# Altium PCB PCB1.PcbDoc (part 2 of 8)
Units mil, origin at the board's own origin, x right, y up, seen from the top; angles counter-clockwise.
Board outline 6000 x 4000 mil, 2 copper layers (Top Layer, Bottom Layer); 1253 components, 565 nets, 6549 pads, 0 vias.
Unrouted connection lines stored in the file: 1925.
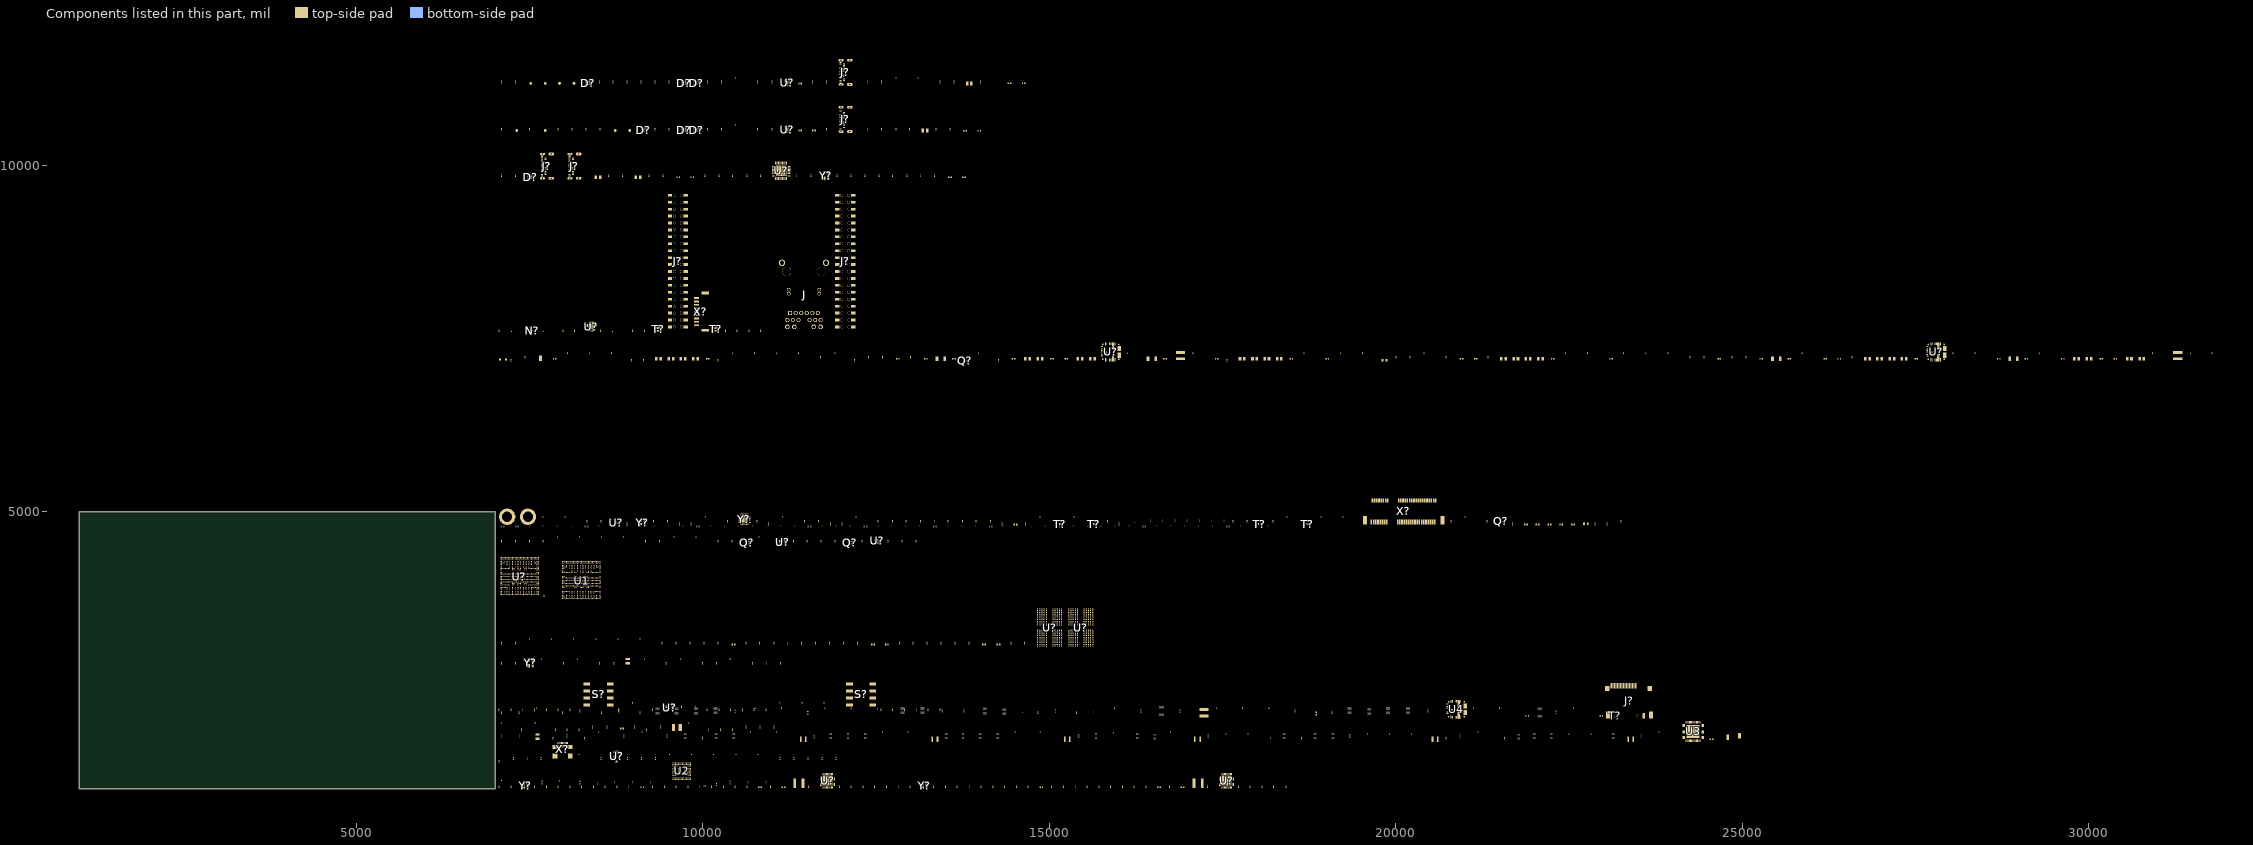
[diagram p2: the components of this part, seen from the top]

## Components (designator, comment, footprint, x,y, rotation, side; value= is the part's Value field where it differs from the comment) (continued)
C? "CAP_0201_100n_X7S_16V" CAP_0201_UN1Q 14355,1025 r90 top value=100nF
C? "CAP_0201_15p" CAP_0201_UN1Q 12990,1025 r90 top value=15pF
C? "CAP_0201_100n_X7S_16V" CAP_0201_UN1Q 8250,1025 r90 top value=100nF
C? "CAP_0201_1uF_X6S" CAP_0201_UN1Q 9955,1025 r90 top value=1uF
C? "CAP_0201_1uF_X6S" CAP_0201_UN1Q 15545,1025 r90 top value=1uF
C? "CAP_0402_10u_X6S" CAP_0402_H09W07_UN1Q 10825,1020 r0 top value=10uF
C? "CAP_0201_15p" CAP_0201_UN1Q 13330,1025 r90 top value=15pF
C? "CAP_0201_100n_X7S_16V" CAP_0201_UN1Q 7910,1025 r90 top value=100nF
C? "CAP_0201_100n_X7S_16V" CAP_0201_UN1Q 7740,1025 r90 top value=100nF
C? "CAP_0201_12pF_RF_MATCHING" CAP_0201_UN1Q 12135,9845 r90 top value=12pF
C? "CAP_0201_100n_X7S_16V" CAP_0201_UN1Q 13145,9845 r90 top value=100nF
C? "CAP_0201_100n_X7S_16V" CAP_0201_UN1Q 12540,9845 r90 top value=100nF
C? "CAP_0201_100n_X7S_16V" CAP_0201_UN1Q 10325,7610 r90 top value=100nF
C? "CAP_0201_100n_X7S_16V" CAP_0201_UN1Q 7060,7610 r90 top value=100nF
C? "CAP_0201_100n_X7S_16V" CAP_0201_UN1Q 9220,9845 r90 top value=100nF
C? "CAP_0402_4u7_10V_X6S" CAP_0402_H09W07_UN1Q 13565,9825 r0 top value=4.7uF
C? "CAP_0201_100n_X7S_16V" CAP_0201_UN1Q 12740,9845 r90 top value=100nF
C? "CAP_0201_100n_X7S_16V" CAP_0201_UN1Q 12340,9845 r90 top value=100nF
C? "CAP_0201_100n_X7S_16V" CAP_0201_UN1Q 11355,9845 r90 top value=100nF
C? "CAP_0805_22uF_10V_X7R" CAP_0805_UN1Q 8485,9825 r0 top value=22uF
C? "CAP_0402_4u7_10V_X6S" CAP_0402_H09W07_UN1Q 13770,9825 r0 top value=4.7uF
C? "CAP_0201_12pF_RF_MATCHING" CAP_0201_UN1Q 11560,9845 r90 top value=12pF
C? "CAP_0201_100n_X7S_16V" CAP_0201_UN1Q 10835,7610 r90 top value=100nF
C? "CAP_0805_2u2_50V_X7R" CAP_0805_UN1Q 30590,7205 r0 top value=2.2uF
C? "CAP_0805_2u2_50V_X7R" CAP_0805_UN1Q 15625,7205 r0 top value=2.2uF
C? "CAP_0805_22uF_10V_X7R" CAP_0805_UN1Q 17785,7205 r0 top value=22uF
C? "CAP_0402_22nF" CAP_0402_UN1Q 15245,7205 r0 top value=22nF
C? "CAP_0402_100nF_50V" CAP_0402_UN1Q 20950,7205 r0 top value=100nF
C? "CAP_0805_2u2_50V_X7R" CAP_0805_UN1Q 14685,7205 r0 top value=2.2uF
C? "CAP_0805_22uF_10V_X7R" CAP_0805_UN1Q 9895,7205 r0 top value=22uF
C? "CAP_0201_100n_X7S_16V" CAP_0201_UN1Q 10665,7610 r90 top value=100nF
C? "CAP_0201_100n_X7S_16V" CAP_0201_UN1Q 7980,7610 r90 top value=100nF
C? "CAP_0201_100n_X7S_16V" CAP_0201_UN1Q 8525,7610 r90 top value=100nF
C? "CAP_1206_10uF_X7R" CAP_1206_UN1Q 25495,7205 r0 top value=10uF
C? "CAP_0805_22uF_10V_X7R" CAP_0805_UN1Q 27165,7205 r0 top value=22uF
C? "CAP_0201_100n_X7S_16V" CAP_0201_UN1Q 10495,7610 r90 top value=100nF
C? "CAP_0201_100n_X7S_16V" CAP_0201_UN1Q 13345,9845 r90 top value=100nF
C? "CAP_0201_100n_X7S_16V" CAP_0201_UN1Q 14005,11200 r90 top value=100nF
C? "CAP_0402_2u2_10V_X6S" CAP_0402_H09W07_UN1Q 11405,11180 r0 top value=2.2uF
C? "CAP_0201_220n_10V_X6S" CAP_0201_UN1Q 10070,11200 r90 top value=220nF
C? "CAP_0201_27p" CAP_0201_UN1Q 12985,10520 r90 top value=27pF
C? "CAP_0201_100n_X7S_16V" CAP_0201_UN1Q 11585,11200 r90 top value=100nF
C? "CAP_0201_220n_10V_X6S" CAP_0201_UN1Q 10995,11200 r90 top value=220nF
C? "CAP_0201_100n_X7S_16V" CAP_0201_UN1Q 8505,11200 r90 top value=100nF
C? "CAP_0201_27p" CAP_0201_UN1Q 13625,11200 r90 top value=27pF
C? "CAP_0805_22uF_10V_X7R" CAP_0805_UN1Q 13845,11180 r0 top value=22uF
C? "CAP_0201_1uF_X6S" CAP_0201_UN1Q 13425,11200 r90 top value=1uF
C? "CAP_0201_220n_10V_X6S" CAP_0201_UN1Q 10270,11200 r90 top value=220nF
C? "CAP_0201_220n_10V_X6S" CAP_0201_UN1Q 10790,11200 r90 top value=220nF
C? "CAP_0201_100n_X7S_16V" CAP_0201_UN1Q 7295,11200 r90 top value=100nF
C? "CAP_0201_100n_X7S_16V" CAP_0201_UN1Q 7500,10520 r90 top value=100nF
C? "CAP_0201_100n_X7S_16V" CAP_0201_UN1Q 7090,10520 r90 top value=100nF
C? "CAP_0805_22uF_10V_X7R" CAP_0805_UN1Q 13205,10500 r0 top value=22uF
C? "CAP_0402_2u2_10V_X6S" CAP_0402_H09W07_UN1Q 11605,10500 r0 top value=2.2uF
C? "CAP_0201_100n_X7S_16V" CAP_0201_UN1Q 12945,9845 r90 top value=100nF
C? "CAP_0201_100n_X7S_16V" CAP_0201_UN1Q 8640,9845 r90 top value=100nF
C? "CAP_0805_22uF_10V_X7R" CAP_0805_UN1Q 9065,9825 r0 top value=22uF
C? "CAP_0201_220n_10V_X6S" CAP_0201_UN1Q 10790,10520 r90 top value=220nF
C? "CAP_0201_220n_10V_X6S" CAP_0201_UN1Q 10995,10520 r90 top value=220nF
C? "CAP_0201_100n_X7S_16V" CAP_0201_UN1Q 13365,10520 r90 top value=100nF
C? "CAP_0201_1uF_X6S" CAP_0201_UN1Q 12785,10520 r90 top value=1uF
C? "CAP_0402_2u2_10V_X6S" CAP_0402_H09W07_UN1Q 11405,10500 r0 top value=2.2uF
C? "CAP_0201_220n_10V_X6S" CAP_0201_UN1Q 10270,10520 r90 top value=220nF
C? "CAP_0201_220n_10V_X6S" CAP_0201_UN1Q 10070,10520 r90 top value=220nF
C? "CAP_0805_22uF_10V_X7R" CAP_0805_UN1Q 21555,7205 r0 top value=22uF
C? "CAP_0805_2u2_50V_X7R" CAP_0805_UN1Q 30770,7205 r0 top value=2.2uF
C? "CAP_0402_100nF_50V" CAP_0402_UN1Q 7860,7205 r0 top value=100nF
C? "CAP_0805_22uF_10V_X7R" CAP_0805_UN1Q 26985,7205 r0 top value=22uF
C? "CAP_0201_2n2" CAP_0201_UN1Q 9140,7185 r90 top value=2.2nF
C? "CAP_0805_22uF_10V_X7R" CAP_0805_UN1Q 22090,7205 r0 top value=22uF
C? "CAP_0402_100nF_50V" CAP_0402_UN1Q 16670,7205 r0 top value=100nF
C? "CAP_0402_100nF_50V" CAP_0402_UN1Q 15040,7205 r0 top value=100nF
C? "CAP_0805_22uF_10V_X7R" CAP_0805_UN1Q 18320,7205 r0 top value=22uF
C? "CAP_0402_100nF_50V" CAP_0402_UN1Q 27515,7205 r0 top value=100nF
C? "CAP_0201_1uF_X6S" CAP_0201_UN1Q 12995,7225 r90 top value=1uF
C? "CAP_0402_100nF_50V" CAP_0402_UN1Q 22265,7205 r0 top value=100nF
C? "CAP_0201_1uF_X6S" CAP_0201_UN1Q 25055,7225 r90 top value=1uF
C? "CAP_0402_100nF_50V" CAP_0402_UN1Q 10070,7205 r0 top value=100nF
C? "CAP_0201_220n_10V_X6S" CAP_0201_UN1Q 14660,4820 r90 top value=220nF
C? "CAP_0402_10u_X6S" CAP_0402_H09W07_UN1Q 22390,4815 r0 top value=10uF
C? "CAP_0201_15p" CAP_0201_UN1Q 9290,4860 r90 top value=15pF
C? "CAP_0201_1uF_X6S" CAP_0201_UN1Q 10780,4860 r90 top value=1uF
C? "CAP_0201_47p" CAP_0201_UN1Q 22880,4820 r90 top value=47pF
C? "CAP_0201_220n_10V_X6S" CAP_0201_UN1Q 16010,4820 r90 top value=220nF
C? "CAP_0201_1n0" CAP_0201_UN1Q 23050,4820 r90 top value=1nF
C? "CAP_0201_100n_X7S_16V" CAP_0201_UN1Q 14320,4820 r90 top value=100nF
C? "CAP_0402_100nF_50V" CAP_0402_UN1Q 21155,7205 r0 top value=100nF
C? "CAP_0402_100nF_50V" CAP_0402_UN1Q 13625,7205 r0 top value=100nF
C? "CAP_0402_10u_X6S" CAP_0402_H09W07_UN1Q 22050,4815 r0 top value=10uF
C? "CAP_0201_100n_X7S_16V" CAP_0201_UN1Q 9830,4820 r90 top value=100nF
C? "CAP_0603_22u_6.3V_X6S" CAP_0603_UN1Q 22745,4825 r0 top value=22uF
C? "CAP_0402_100nF_50V" CAP_0402_UN1Q 30185,7205 r0 top value=100nF
C? "CAP_0805_2u2_50V_X7R" CAP_0805_UN1Q 15445,7205 r0 top value=2.2uF
C? "CAP_0805_22uF_10V_X7R" CAP_0805_UN1Q 9360,7205 r0 top value=22uF
C? "CAP_0805_2u2_50V_X7R" CAP_0805_UN1Q 14865,7205 r0 top value=2.2uF
C? "CAP_0402_22nF" CAP_0402_UN1Q 30390,7205 r0 top value=22nF
C? "CAP_0805_22uF_10V_X7R" CAP_0805_UN1Q 18140,7205 r0 top value=22uF
C? "CAP_0805_22uF_10V_X7R" CAP_0805_UN1Q 21735,7205 r0 top value=22uF
C? "CAP_0402_100nF_50V" CAP_0402_UN1Q 18495,7205 r0 top value=100nF
C? "CAP_0201_10pF_RF_MATCHING" CAP_0201_UN1Q 8970,7185 r90 top value=10pF
C? "CAP_0805_22uF_10V_X7R" CAP_0805_UN1Q 26810,7205 r0 top value=22uF
C? "CAP_1206_10uF_X7R" CAP_1206_UN1Q 28920,7205 r0 top value=10uF
C? "CAP_0805_22uF_10V_X7R" CAP_0805_UN1Q 9540,7205 r0 top value=22uF
C? "CAP_0402_100nF_50V" CAP_0402_UN1Q 26200,7205 r0 top value=100nF
C? "CAP_0805_22uF_10V_X7R" CAP_0805_UN1Q 21910,7205 r0 top value=22uF
C? "CAP_0402_100nF_50V" CAP_0402_UN1Q 13220,7205 r0 top value=100nF
C? "CAP_0402_100nF_50V" CAP_0402_UN1Q 25680,7205 r0 top value=100nF
C? "CAP_0402_100nF_50V" CAP_0402_UN1Q 12815,7205 r0 top value=100nF
C? "CAP_0805_2u2_50V_X7R" CAP_0805_UN1Q 30010,7205 r0 top value=2.2uF
C? "CAP_1206_10uF_X7R" CAP_1206_UN1Q 13435,7205 r0 top value=10uF
C? "CAP_0805_2u2_50V_X7R" CAP_0805_UN1Q 29830,7205 r0 top value=2.2uF
C? "CAP_1206_10uF_X7R" CAP_1206_UN1Q 16480,7205 r0 top value=10uF
C? "CAP_0402_100nF_50V" CAP_0402_UN1Q 25275,7205 r0 top value=100nF
C? "CAP_0402_100nF_50V" CAP_0402_UN1Q 17415,7205 r0 top value=100nF
C? "CAP_0805_22uF_10V_X7R" CAP_0805_UN1Q 9715,7205 r0 top value=22uF
C? "CAP_0402_100nF_50V" CAP_0402_UN1Q 29105,7205 r0 top value=100nF
C? "CAP_0805_22uF_10V_X7R" CAP_0805_UN1Q 17965,7205 r0 top value=22uF
C? "CAP_0805_22uF_10V_X7R" CAP_0805_UN1Q 27340,7205 r0 top value=22uF
C? "CAP_0402_100nF_50V" CAP_0402_UN1Q 24670,7205 r0 top value=100nF
D? "TPD4E05U06DQAR" USON10_DQA_TI 9150,10505 r0 top
D? "TPD4E05U06DQAR" USON10_DQA_TI 9730,10505 r0 top
D? "TPD4E05U06DQAR" USON10_DQA_TI 7515,9825 r0 top
D? "TPD4E05U06DQAR" USON10_DQA_TI 9910,10505 r0 top
D? "TPD4E05U06DQAR" USON10_DQA_TI 9730,11185 r0 top
D? "TPD4E05U06DQAR" USON10_DQA_TI 8345,11185 r0 top
D? "TPD4E05U06DQAR" USON10_DQA_TI 9910,11185 r0 top
D? "TPD4E05U06DQAR" USON10_DQA_TI 9150,10505 r0 top
D? "TPD4E05U06DQAR" USON10_DQA_TI 9730,10505 r0 top
D? "TPD4E05U06DQAR" USON10_DQA_TI 7515,9825 r0 top
D? "TPD4E05U06DQAR" USON10_DQA_TI 9910,10505 r0 top
D? "TPD4E05U06DQAR" USON10_DQA_TI 9730,11185 r0 top
D? "TPD4E05U06DQAR" USON10_DQA_TI 8345,11185 r0 top
D? "TPD4E05U06DQAR" USON10_DQA_TI 9910,11185 r0 top
J "0826-1X1T-M1-F" BEL_0826-1X1T-M1-F 11460,8465 r0 top
J "0826-1X1T-M1-F" BEL_0826-1X1T-M1-F 11460,8465 r0 top
J1 "PAD 1 x 2 mm" TP_1x2mm_UN1Q 24795,1745 r0 top
J2 "PAD 1 x 2 mm" TP_1x2mm_UN1Q 24965,1765 r0 top
J? "USB_C_AMPHENOL_124018612112A" USB_C_AMPHENOL_124018612112A 7745,9985 r90 top
J? "USB_C_AMPHENOL_124018612112A" USB_C_AMPHENOL_124018612112A 8140,9985 r90 top
J? "Testpoint, Surface, 1.0mm" TP_1mm_UN1Q 8735,10500 r0 top
J? "USB_C_AMPHENOL_124018612112A" USB_C_AMPHENOL_124018612112A 12055,10660 r90 top
J? "PAD 1 x 2 mm" TP_1x2mm_UN1Q 7655,7210 r0 top
J? "NPTC202KFMS-RC" SULLINS_NPTC202KFMS-RC 9640,8615 r90 top
J? "NPTC202KFMS-RC" SULLINS_NPTC202KFMS-RC 12055,8615 r90 top
J? "Testpoint, Surface, 1.0mm" TP_1mm_UN1Q 7315,10500 r0 top
J? "USB_C_AMPHENOL_124018612112A" USB_C_AMPHENOL_124018612112A 12055,11340 r90 top
J? "Testpoint, Surface, 1.0mm" TP_1mm_UN1Q 7930,11180 r0 top
J? "Testpoint, Surface, 1.0mm" TP_1mm_UN1Q 7515,11180 r0 top
J? "Testpoint, Surface, 1.0mm" TP_1mm_UN1Q 7725,11180 r0 top
J? "Testpoint, Surface, 1.0mm" TP_1mm_UN1Q 7725,10500 r0 top
J? "Testpoint, Surface, 1.0mm" TP_1mm_UN1Q 8945,10500 r0 top
J? "Testpoint, Surface, 1.0mm" TP_1mm_UN1Q 8140,11180 r0 top
J? "USB_C_AMPHENOL_124018612112A" USB_C_AMPHENOL_124018612112A 7745,9985 r90 top
J? "USB_C_AMPHENOL_124018612112A" USB_C_AMPHENOL_124018612112A 8140,9985 r90 top
J? "Testpoint, Surface, 1.0mm" TP_1mm_UN1Q 8735,10500 r0 top
J? "USB_C_AMPHENOL_124018612112A" USB_C_AMPHENOL_124018612112A 12055,10660 r90 top
J? "PAD 1 x 2 mm" TP_1x2mm_UN1Q 7655,7210 r0 top
J? "NPTC202KFMS-RC" SULLINS_NPTC202KFMS-RC 9640,8615 r90 top
J? "NPTC202KFMS-RC" SULLINS_NPTC202KFMS-RC 12055,8615 r90 top
J? "Testpoint, Surface, 1.0mm" TP_1mm_UN1Q 7315,10500 r0 top
J? "USB_C_AMPHENOL_124018612112A" USB_C_AMPHENOL_124018612112A 12055,11340 r90 top
J? "Testpoint, Surface, 1.0mm" TP_1mm_UN1Q 7930,11180 r0 top
J? "Testpoint, Surface, 1.0mm" TP_1mm_UN1Q 7515,11180 r0 top
J? "Testpoint, Surface, 1.0mm" TP_1mm_UN1Q 7725,11180 r0 top
J? "Testpoint, Surface, 1.0mm" TP_1mm_UN1Q 7725,10500 r0 top
J? "Testpoint, Surface, 1.0mm" TP_1mm_UN1Q 8945,10500 r0 top
J? "Testpoint, Surface, 1.0mm" TP_1mm_UN1Q 8140,11180 r0 top
J? "693071020811" 693071020811 23375,2050 r0 top
J? "PAD 1 x 2 mm" TP_1x2mm_UN1Q 23580,2050 r0 top
L1 "IND_VLS2520_0u47" IND_VLS2520 23395,1710 r0 top value=0.47uH
L2 "IND_VLS2520_0u47" IND_VLS2520 20570,1710 r0 top value=0.47uH
L3 "IND_VLS2520_0u47" IND_VLS2520 17140,1710 r0 top value=0.47uH
L4 "IND_VLS2520_0u47" IND_VLS2520 15260,1710 r0 top value=0.47uH
L5 "IND_VLS2520_0u47" IND_VLS2520 13350,1710 r0 top value=0.47uH
L6 "IND_VLS2520_0u47" IND_VLS2520 11450,1710 r0 top value=0.47uH
L7 "FERRITE_0402_BLM15KD" FERR_BLM15KD 24560,1710 r0 top value=30R@100MHz
L8 "FERRITE_0402_BLM15KD" FERR_BLM15KD 22970,2050 r0 top value=30R@100MHz
L9 "FERRITE_0402_BLM15KD" FERR_BLM15KD 21900,2050 r0 top value=30R@100MHz
L10 "IND_XGL4030_1u" IND_XGL4030 17235,2095 r90 top value=1uH
L11 "FERRITE_0402_BLM15KD" FERR_BLM15KD 18855,2085 r90 top value=30R@100MHz
L12 "FERRITE_0402_BLM15KD" FERR_BLM15KD 11515,2095 r90 top value=30R@100MHz
L? "FERRITE_0201_BLF_700MHz_420Ohm" IND_0201_UN1Q 9375,4570 r90 top value=420R@700MHz
L? "FERRITE_0201_BLF_700MHz_420Ohm" IND_0201_UN1Q 12530,4860 r90 top value=420R@700MHz
L? "FERRITE_0201_BLM03_33Ohm" IND_0201_UN1Q 9315,1435 r90 top value=33R@100MHz
L? "FERRITE_0201_BLF_700MHz_420Ohm" IND_0201_UN1Q 13075,4570 r90 top value=420R@700MHz
L? "FERRITE_0402_BLM15KD" FERR_BLM15KD 14485,7205 r0 top value=30R@100MHz
L? "FERRITE_0402_BLM15KD" FERR_BLM15KD 29630,7205 r0 top value=30R@100MHz
L? "FERRITE_0201_BLF_700MHz_420Ohm" IND_0201_UN1Q 11470,4860 r90 top value=420R@700MHz
L? "FERRITE_0201_BLF_700MHz_420Ohm" IND_0201_UN1Q 10355,4860 r90 top value=420R@700MHz
L? "IND_74479335329222_2u2" IND_74479335329222_353220 11385,1075 r0 top value=2.2uH
L? "FERRITE_0201_BLM03_33Ohm" IND_0201_UN1Q 18070,1025 r90 top value=33R@100MHz
L? "FERRITE_0201_BLM03_33Ohm" IND_0201_UN1Q 10125,1025 r90 top value=33R@100MHz
L? "FERRITE_0201_BLM03_33Ohm" IND_0201_UN1Q 17285,1025 r90 top value=33R@100MHz
L? "FERRITE_0201_BLM03_33Ohm" IND_0201_UN1Q 12310,1025 r90 top value=33R@100MHz
L? "FERRITE_0201_BLM03_33Ohm" IND_0201_UN1Q 15885,1025 r90 top value=33R@100MHz
L? "FERRITE_0201_BLM03_33Ohm" IND_0201_UN1Q 11525,1025 r90 top value=33R@100MHz
L? "IND_74479335329222_2u2" IND_74479335329222_353220 17150,1075 r0 top value=2.2uH
L? "FERRITE_0201_BLM03_33Ohm" IND_0201_UN1Q 7090,9845 r90 top value=33R@100MHz
L? "FERRITE_0201_BLM03_33Ohm" IND_0201_UN1Q 7295,9845 r90 top value=33R@100MHz
L? "FERRITE_0201_BLF_700MHz_420Ohm" IND_0201_UN1Q 8985,7610 r90 top value=420R@700MHz
L? "FERRITE_0201_BLF_700MHz_420Ohm" IND_0201_UN1Q 11935,9845 r90 top value=420R@700MHz
L? "FERRITE_0201_BLM03_33Ohm" IND_0201_UN1Q 9510,11200 r90 top value=33R@100MHz
L? "FERRITE_0201_BLM03_33Ohm" IND_0201_UN1Q 11785,11200 r90 top value=33R@100MHz
L? "FERRITE_0201_BLM03_33Ohm" IND_0201_UN1Q 9510,10520 r90 top value=33R@100MHz
L? "FERRITE_0201_BLM03_33Ohm" IND_0201_UN1Q 11785,10520 r90 top value=33R@100MHz
L? "FERRITE_0402_BLM15KD" FERR_BLM15KD 19015,7205 r0 top value=30R@100MHz
L? "IND_XGL4030_1u" IND_XGL4030 16895,7250 r90 top value=1uH
L? "IND_XGL4030_1u" IND_XGL4030 31290,7250 r90 top value=1uH
L? "FERRITE_0402_BLM15KD" FERR_BLM15KD 23110,7205 r0 top value=30R@100MHz
L? "FERRITE_0603_BLM18_6A" IND_0603_UN1Q 19840,7185 r0 top value="26R @ 100MHz"
L? "FERRITE_0201_BLM03_33Ohm" IND_0201_UN1Q 8150,7610 r90 top value=33R@100MHz
L? "FERRITE_0402_BLM15KD" FERR_BLM15KD 28705,7205 r0 top value=30R@100MHz
L? "FERRITE_0402_BLM15KD" FERR_BLM15KD 26405,7205 r0 top value=30R@100MHz
L? "FERRITE_0201_BLF_700MHz_420Ohm" IND_0201_UN1Q 9375,4570 r90 top value=420R@700MHz
L? "FERRITE_0201_BLF_700MHz_420Ohm" IND_0201_UN1Q 12530,4860 r90 top value=420R@700MHz
L? "FERRITE_0201_BLM03_33Ohm" IND_0201_UN1Q 9315,1435 r90 top value=33R@100MHz
L? "FERRITE_0201_BLF_700MHz_420Ohm" IND_0201_UN1Q 13075,4570 r90 top value=420R@700MHz
L? "FERRITE_0402_BLM15KD" FERR_BLM15KD 14485,7205 r0 top value=30R@100MHz
L? "FERRITE_0402_BLM15KD" FERR_BLM15KD 29630,7205 r0 top value=30R@100MHz
L? "FERRITE_0201_BLF_700MHz_420Ohm" IND_0201_UN1Q 11470,4860 r90 top value=420R@700MHz
L? "FERRITE_0201_BLF_700MHz_420Ohm" IND_0201_UN1Q 10355,4860 r90 top value=420R@700MHz
L? "IND_74479335329222_2u2" IND_74479335329222_353220 11385,1075 r0 top value=2.2uH
L? "FERRITE_0201_BLM03_33Ohm" IND_0201_UN1Q 18070,1025 r90 top value=33R@100MHz
L? "FERRITE_0201_BLM03_33Ohm" IND_0201_UN1Q 10125,1025 r90 top value=33R@100MHz
L? "FERRITE_0201_BLM03_33Ohm" IND_0201_UN1Q 17285,1025 r90 top value=33R@100MHz
L? "FERRITE_0201_BLM03_33Ohm" IND_0201_UN1Q 12310,1025 r90 top value=33R@100MHz
L? "FERRITE_0201_BLM03_33Ohm" IND_0201_UN1Q 15885,1025 r90 top value=33R@100MHz
L? "FERRITE_0201_BLM03_33Ohm" IND_0201_UN1Q 11525,1025 r90 top value=33R@100MHz
L? "IND_74479335329222_2u2" IND_74479335329222_353220 17150,1075 r0 top value=2.2uH
L? "FERRITE_0201_BLM03_33Ohm" IND_0201_UN1Q 7090,9845 r90 top value=33R@100MHz
L? "FERRITE_0201_BLM03_33Ohm" IND_0201_UN1Q 7295,9845 r90 top value=33R@100MHz
L? "FERRITE_0201_BLF_700MHz_420Ohm" IND_0201_UN1Q 8985,7610 r90 top value=420R@700MHz
L? "FERRITE_0201_BLF_700MHz_420Ohm" IND_0201_UN1Q 11935,9845 r90 top value=420R@700MHz
L? "FERRITE_0201_BLM03_33Ohm" IND_0201_UN1Q 9510,11200 r90 top value=33R@100MHz
L? "FERRITE_0201_BLM03_33Ohm" IND_0201_UN1Q 11785,11200 r90 top value=33R@100MHz
L? "FERRITE_0201_BLM03_33Ohm" IND_0201_UN1Q 9510,10520 r90 top value=33R@100MHz
L? "FERRITE_0201_BLM03_33Ohm" IND_0201_UN1Q 11785,10520 r90 top value=33R@100MHz
L? "FERRITE_0402_BLM15KD" FERR_BLM15KD 19015,7205 r0 top value=30R@100MHz
L? "IND_XGL4030_1u" IND_XGL4030 16895,7250 r90 top value=1uH
L? "IND_XGL4030_1u" IND_XGL4030 31290,7250 r90 top value=1uH
L? "FERRITE_0402_BLM15KD" FERR_BLM15KD 23110,7205 r0 top value=30R@100MHz
L? "FERRITE_0603_BLM18_6A" IND_0603_UN1Q 19840,7185 r0 top value="26R @ 100MHz"
L? "FERRITE_0201_BLM03_33Ohm" IND_0201_UN1Q 8150,7610 r90 top value=33R@100MHz
L? "FERRITE_0402_BLM15KD" FERR_BLM15KD 28705,7205 r0 top value=30R@100MHz
L? "FERRITE_0402_BLM15KD" FERR_BLM15KD 26405,7205 r0 top value=30R@100MHz
M? "Standoff_2_7mm_M25_WURTH" Standoff_2_7mm_M25_WURTH 7475,4925 r0 top
M? "Standoff_2_7mm_M25_WURTH" Standoff_2_7mm_M25_WURTH 7175,4925 r0 top
M? "Standoff_2_7mm_M25_WURTH" Standoff_2_7mm_M25_WURTH 7475,4925 r0 top
M? "Standoff_2_7mm_M25_WURTH" Standoff_2_7mm_M25_WURTH 7175,4925 r0 top
N? "TMP110DIDPWR" X2SON_DPW0005B 7540,7610 r0 top
N? "TMP110DIDPWR" X2SON_DPW0005B 7540,7610 r0 top
PTP1 "PTP_0.4mm" PTP_0.4mm 7930,1110 r90 top
PTP2 "PTP_0.4mm" PTP_0.4mm 7090,1120 r90 top
PTP3 "PTP_0.4mm" PTP_0.4mm 22500,1790 r90 top
PTP4 "PTP_0.4mm" PTP_0.4mm 22820,1790 r90 top
PTP5 "PTP_0.4mm" PTP_0.4mm 19595,1790 r90 top
PTP6 "PTP_0.4mm" PTP_0.4mm 19910,1790 r90 top
PTP7 "PTP_0.4mm" PTP_0.4mm 20230,1790 r90 top
PTP8 "PTP_0.4mm" PTP_0.4mm 17550,1790 r90 top
PTP9 "PTP_0.4mm" PTP_0.4mm 17870,1790 r90 top
PTP10 "PTP_0.4mm" PTP_0.4mm 16750,1815 r90 top
PTP11 "PTP_0.4mm" PTP_0.4mm 15925,1805 r90 top
PTP12 "PTP_0.4mm" PTP_0.4mm 14505,1815 r90 top
PTP13 "PTP_0.4mm" PTP_0.4mm 14870,1815 r90 top
PTP14 "PTP_0.4mm" PTP_0.4mm 12590,1815 r90 top
PTP15 "PTP_0.4mm" PTP_0.4mm 12960,1815 r90 top
PTP16 "PTP_0.4mm" PTP_0.4mm 10690,1815 r90 top
PTP17 "PTP_0.4mm" PTP_0.4mm 11060,1815 r90 top
PTP18 "PTP_0.4mm" PTP_0.4mm 9120,1815 r90 top
PTP19 "PTP_0.4mm" PTP_0.4mm 8490,1815 r90 top
PTP22 "PTP_0.4mm" PTP_0.4mm 23800,1820 r90 top
PTP23 "PTP_0.4mm" PTP_0.4mm 21190,1820 r90 top
PTP24 "PTP_0.4mm" PTP_0.4mm 22570,2160 r90 top
PTP25 "PTP_0.4mm" PTP_0.4mm 17410,2160 r90 top
PTP26 "PTP_0.4mm" PTP_0.4mm 21500,2160 r90 top
PTP27 "PTP_0.4mm" PTP_0.4mm 15940,2160 r90 top
PTP28 "PTP_0.4mm" PTP_0.4mm 21120,2160 r90 top
PTP29 "PTP_0.4mm" PTP_0.4mm 17790,2160 r90 top
PTP30 "PTP_0.4mm" PTP_0.4mm 18170,2160 r90 top
PTP31 "PTP_0.4mm" PTP_0.4mm 12520,2150 r90 top
PTP32 "PTP_0.4mm" PTP_0.4mm 12140,2160 r90 top
PTP33 "PTP_0.4mm" PTP_0.4mm 11760,2160 r90 top
PTP34 "PTP_0.4mm" PTP_0.4mm 11135,2160 r90 top
PTP35 "PTP_0.4mm" PTP_0.4mm 10755,2160 r90 top
PTP36 "PTP_0.4mm" PTP_0.4mm 7595,2160 r90 top
PTP? "PTP_0.4mm" PTP_0.4mm 8220,4630 r90 top
PTP? "PTP_0.4mm" PTP_0.4mm 9580,4630 r90 top
PTP? "PTP_0.4mm" PTP_0.4mm 9900,4630 r90 top
PTP? "PTP_0.4mm" PTP_0.4mm 7900,4630 r90 top
PTP? "PTP_0.4mm" PTP_0.4mm 9095,3160 r90 top
PTP? "PTP_0.4mm" PTP_0.4mm 8135,3160 r90 top
PTP? "PTP_0.4mm" PTP_0.4mm 7495,3160 r90 top
PTP? "PTP_0.4mm" PTP_0.4mm 8775,3160 r90 top
PTP? "PTP_0.4mm" PTP_0.4mm 19240,4920 r90 top
PTP? "PTP_0.4mm" PTP_0.4mm 21000,4920 r90 top
PTP? "PTP_0.4mm" PTP_0.4mm 15355,4920 r90 top
PTP? "PTP_0.4mm" PTP_0.4mm 14865,4920 r90 top
PTP? "PTP_0.4mm" PTP_0.4mm 10810,4630 r90 top
PTP? "PTP_0.4mm" PTP_0.4mm 8855,4630 r90 top
PTP? "PTP_0.4mm" PTP_0.4mm 8535,4630 r90 top
PTP? "PTP_0.4mm" PTP_0.4mm 12210,4920 r90 top
PTP? "PTP_0.4mm" PTP_0.4mm 18430,4920 r90 top
PTP? "PTP_0.4mm" PTP_0.4mm 7580,1950 r90 top
PTP? "PTP_0.4mm" PTP_0.4mm 10795,1495 r90 top
PTP? "PTP_0.4mm" PTP_0.4mm 7090,1950 r90 top
PTP? "PTP_0.4mm" PTP_0.4mm 11430,2240 r90 top
PTP? "PTP_0.4mm" PTP_0.4mm 9795,1950 r90 top
PTP? "PTP_0.4mm" PTP_0.4mm 9835,1495 r90 top
PTP? "PTP_0.4mm" PTP_0.4mm 10155,1495 r90 top
PTP? "PTP_0.4mm" PTP_0.4mm 8210,1495 r90 top
PTP? "PTP_0.4mm" PTP_0.4mm 10475,1495 r90 top
PTP? "PTP_0.4mm" PTP_0.4mm 9520,1495 r90 top
PTP? "PTP_0.4mm" PTP_0.4mm 7670,2870 r90 top
PTP? "PTP_0.4mm" PTP_0.4mm 9675,2870 r90 top
PTP? "PTP_0.4mm" PTP_0.4mm 8190,2870 r90 top
PTP? "PTP_0.4mm" PTP_0.4mm 8455,3160 r90 top
PTP? "PTP_0.4mm" PTP_0.4mm 7815,3160 r90 top
PTP? "PTP_0.4mm" PTP_0.4mm 11110,2240 r90 top
PTP? "PTP_0.4mm" PTP_0.4mm 8985,2240 r90 top
PTP? "PTP_0.4mm" PTP_0.4mm 11750,2240 r90 top
PTP? "PTP_0.4mm" PTP_0.4mm 10395,2870 r90 top
PTP? "PTP_0.4mm" PTP_0.4mm 9155,2870 r90 top
PTP? "PTP_0.4mm" PTP_0.4mm 28365,7285 r90 top
PTP? "PTP_0.4mm" PTP_0.4mm 22450,7285 r90 top
PTP? "PTP_0.4mm" PTP_0.4mm 10425,7285 r90 top
PTP? "PTP_0.4mm" PTP_0.4mm 22770,7285 r90 top
PTP? "PTP_0.4mm" PTP_0.4mm 25865,7285 r90 top
PTP? "PTP_0.4mm" PTP_0.4mm 31785,7285 r90 top
PTP? "PTP_0.4mm" PTP_0.4mm 20410,7285 r90 top
PTP? "PTP_0.4mm" PTP_0.4mm 8680,7285 r90 top
PTP? "PTP_0.4mm" PTP_0.4mm 31470,7285 r90 top
PTP? "PTP_0.4mm" PTP_0.4mm 19200,7285 r90 top
PTP? "PTP_0.4mm" PTP_0.4mm 10470,10580 r90 top
PTP? "PTP_0.4mm" PTP_0.4mm 10470,11260 r90 top
PTP? "PTP_0.4mm" PTP_0.4mm 13105,11260 r90 top
PTP? "PTP_0.4mm" PTP_0.4mm 12785,11260 r90 top
PTP? "PTP_0.4mm" PTP_0.4mm 28045,7285 r90 top
PTP? "PTP_0.4mm" PTP_0.4mm 29290,7285 r90 top
PTP? "PTP_0.4mm" PTP_0.4mm 7235,7600 r90 top
PTP? "PTP_0.4mm" PTP_0.4mm 7695,7600 r90 top
PTP? "PTP_0.4mm" PTP_0.4mm 8695,7600 r90 top
PTP? "PTP_0.4mm" PTP_0.4mm 30925,7285 r90 top
PTP? "PTP_0.4mm" PTP_0.4mm 18675,7285 r90 top
PTP? "PTP_0.4mm" PTP_0.4mm 11905,7285 r90 top
PTP? "PTP_0.4mm" PTP_0.4mm 13975,7285 r90 top
PTP? "PTP_0.4mm" PTP_0.4mm 11060,7285 r90 top
PTP? "PTP_0.4mm" PTP_0.4mm 8010,4920 r90 top
PTP? "PTP_0.4mm" PTP_0.4mm 7690,4920 r90 top
PTP? "PTP_0.4mm" PTP_0.4mm 11150,4920 r90 top
PTP? "PTP_0.4mm" PTP_0.4mm 18920,4920 r90 top
PTP? "PTP_0.4mm" PTP_0.4mm 10035,4920 r90 top
PTP? "PTP_0.4mm" PTP_0.4mm 17075,7285 r90 top
PTP? "PTP_0.4mm" PTP_0.4mm 8045,7285 r90 top
PTP? "PTP_0.4mm" PTP_0.4mm 11380,7285 r90 top
PTP? "PTP_0.4mm" PTP_0.4mm 10745,7285 r90 top
PTP? "PTP_0.4mm" PTP_0.4mm 23290,7285 r90 top
PTP? "PTP_0.4mm" PTP_0.4mm 8360,7285 r90 top
PTP? "PTP_0.4mm" PTP_0.4mm 16125,7285 r90 top
PTP? "PTP_0.4mm" PTP_0.4mm 23930,7285 r90 top
PTP? "PTP_0.4mm" PTP_0.4mm 19520,7285 r90 top
PTP? "PTP_0.4mm" PTP_0.4mm 23610,7285 r90 top
PTP? "PTP_0.4mm" PTP_0.4mm 8220,4630 r90 top
PTP? "PTP_0.4mm" PTP_0.4mm 9580,4630 r90 top
PTP? "PTP_0.4mm" PTP_0.4mm 9900,4630 r90 top
PTP? "PTP_0.4mm" PTP_0.4mm 7900,4630 r90 top
PTP? "PTP_0.4mm" PTP_0.4mm 9095,3160 r90 top
PTP? "PTP_0.4mm" PTP_0.4mm 8135,3160 r90 top
PTP? "PTP_0.4mm" PTP_0.4mm 7495,3160 r90 top
PTP? "PTP_0.4mm" PTP_0.4mm 8775,3160 r90 top
PTP? "PTP_0.4mm" PTP_0.4mm 19240,4920 r90 top
PTP? "PTP_0.4mm" PTP_0.4mm 21000,4920 r90 top
PTP? "PTP_0.4mm" PTP_0.4mm 15355,4920 r90 top
PTP? "PTP_0.4mm" PTP_0.4mm 14865,4920 r90 top
PTP? "PTP_0.4mm" PTP_0.4mm 10810,4630 r90 top
PTP? "PTP_0.4mm" PTP_0.4mm 8855,4630 r90 top
PTP? "PTP_0.4mm" PTP_0.4mm 8535,4630 r90 top
PTP? "PTP_0.4mm" PTP_0.4mm 12210,4920 r90 top
PTP? "PTP_0.4mm" PTP_0.4mm 18430,4920 r90 top
PTP? "PTP_0.4mm" PTP_0.4mm 7580,1950 r90 top
PTP? "PTP_0.4mm" PTP_0.4mm 10795,1495 r90 top
PTP? "PTP_0.4mm" PTP_0.4mm 7090,1950 r90 top
PTP? "PTP_0.4mm" PTP_0.4mm 11430,2240 r90 top
PTP? "PTP_0.4mm" PTP_0.4mm 9795,1950 r90 top
PTP? "PTP_0.4mm" PTP_0.4mm 9835,1495 r90 top
PTP? "PTP_0.4mm" PTP_0.4mm 10155,1495 r90 top
PTP? "PTP_0.4mm" PTP_0.4mm 8210,1495 r90 top
PTP? "PTP_0.4mm" PTP_0.4mm 10475,1495 r90 top
PTP? "PTP_0.4mm" PTP_0.4mm 9520,1495 r90 top
PTP? "PTP_0.4mm" PTP_0.4mm 7670,2870 r90 top
PTP? "PTP_0.4mm" PTP_0.4mm 9675,2870 r90 top
PTP? "PTP_0.4mm" PTP_0.4mm 8190,2870 r90 top
PTP? "PTP_0.4mm" PTP_0.4mm 8455,3160 r90 top
PTP? "PTP_0.4mm" PTP_0.4mm 7815,3160 r90 top
PTP? "PTP_0.4mm" PTP_0.4mm 11110,2240 r90 top
PTP? "PTP_0.4mm" PTP_0.4mm 8985,2240 r90 top
PTP? "PTP_0.4mm" PTP_0.4mm 11750,2240 r90 top
PTP? "PTP_0.4mm" PTP_0.4mm 10395,2870 r90 top
PTP? "PTP_0.4mm" PTP_0.4mm 9155,2870 r90 top
PTP? "PTP_0.4mm" PTP_0.4mm 28365,7285 r90 top
PTP? "PTP_0.4mm" PTP_0.4mm 22450,7285 r90 top
PTP? "PTP_0.4mm" PTP_0.4mm 10425,7285 r90 top
PTP? "PTP_0.4mm" PTP_0.4mm 22770,7285 r90 top
PTP? "PTP_0.4mm" PTP_0.4mm 25865,7285 r90 top
PTP? "PTP_0.4mm" PTP_0.4mm 31785,7285 r90 top
PTP? "PTP_0.4mm" PTP_0.4mm 20410,7285 r90 top
PTP? "PTP_0.4mm" PTP_0.4mm 8680,7285 r90 top
PTP? "PTP_0.4mm" PTP_0.4mm 31470,7285 r90 top
PTP? "PTP_0.4mm" PTP_0.4mm 19200,7285 r90 top
PTP? "PTP_0.4mm" PTP_0.4mm 10470,10580 r90 top
PTP? "PTP_0.4mm" PTP_0.4mm 10470,11260 r90 top
PTP? "PTP_0.4mm" PTP_0.4mm 13105,11260 r90 top
PTP? "PTP_0.4mm" PTP_0.4mm 12785,11260 r90 top
PTP? "PTP_0.4mm" PTP_0.4mm 28045,7285 r90 top
PTP? "PTP_0.4mm" PTP_0.4mm 29290,7285 r90 top
PTP? "PTP_0.4mm" PTP_0.4mm 7235,7600 r90 top
PTP? "PTP_0.4mm" PTP_0.4mm 7695,7600 r90 top
PTP? "PTP_0.4mm" PTP_0.4mm 8695,7600 r90 top
PTP? "PTP_0.4mm" PTP_0.4mm 30925,7285 r90 top
PTP? "PTP_0.4mm" PTP_0.4mm 18675,7285 r90 top
PTP? "PTP_0.4mm" PTP_0.4mm 11905,7285 r90 top
PTP? "PTP_0.4mm" PTP_0.4mm 13975,7285 r90 top
PTP? "PTP_0.4mm" PTP_0.4mm 11060,7285 r90 top
PTP? "PTP_0.4mm" PTP_0.4mm 8010,4920 r90 top
PTP? "PTP_0.4mm" PTP_0.4mm 7690,4920 r90 top
PTP? "PTP_0.4mm" PTP_0.4mm 11150,4920 r90 top
PTP? "PTP_0.4mm" PTP_0.4mm 18920,4920 r90 top
PTP? "PTP_0.4mm" PTP_0.4mm 10035,4920 r90 top
PTP? "PTP_0.4mm" PTP_0.4mm 17075,7285 r90 top
PTP? "PTP_0.4mm" PTP_0.4mm 8045,7285 r90 top
PTP? "PTP_0.4mm" PTP_0.4mm 11380,7285 r90 top
PTP? "PTP_0.4mm" PTP_0.4mm 10745,7285 r90 top
PTP? "PTP_0.4mm" PTP_0.4mm 23290,7285 r90 top
PTP? "PTP_0.4mm" PTP_0.4mm 8360,7285 r90 top
PTP? "PTP_0.4mm" PTP_0.4mm 16125,7285 r90 top
PTP? "PTP_0.4mm" PTP_0.4mm 23930,7285 r90 top
PTP? "PTP_0.4mm" PTP_0.4mm 19520,7285 r90 top
PTP? "PTP_0.4mm" PTP_0.4mm 23610,7285 r90 top
Q? "EM6M2T2R" SOT-563 12130,4550 r0 top
Q? "EM6M2T2R" SOT-563 10640,4550 r0 top
Q? "CSD17483F4" 3-PICOSTAR_TI 13785,7180 r0 top
Q? "PMZ390UNE" SOT883_DFN1006-3_NEXPERIA 21525,4860 r90 top
Q? "EM6M2T2R" SOT-563 12130,4550 r0 top
Q? "EM6M2T2R" SOT-563 10640,4550 r0 top
Q? "CSD17483F4" 3-PICOSTAR_TI 13785,7180 r0 top
Q? "PMZ390UNE" SOT883_DFN1006-3_NEXPERIA 21525,4860 r90 top
QZ1 "XTAL_CM8V-T1A-32_768KHZ-9PF-20PPM-TA-QC" CM8V32768TA020125_MC 7615,1750 r90 top value="32.768 kHz"
QZ? "XTAL_CM8V-T1A-32_768KHZ-9PF-20PPM-TA-QC" CM8V32768TA020125_MC 8915,2840 r90 top value="32.768 kHz"
QZ? "XTAL_CM8V-T1A-32_768KHZ-9PF-20PPM-TA-QC" CM8V32768TA020125_MC 8915,2840 r90 top value="32.768 kHz"
R1 "RES_0201_NA" RES_0201_UN1Q 10025,1040 r0 top value=10K
R2 "RES_0201_NA" RES_0201_UN1Q 10195,1060 r90 top value=10K
R3 "RES_0201_NA" RES_0201_UN1Q 21570,1730 r90 top value=NA
R4 "RES_0201_0R" RES_0201_UN1Q 20730,1730 r90 top value=0R
R5 "RES_0201_NA" RES_0201_UN1Q 18640,1730 r90 top value=NA
R6 "RES_0201_0R" RES_0201_UN1Q 18190,1730 r90 top value=0R
R7 "RES_0201_100k" RES_0201_UN1Q 9995,1730 r90 top value=100k
R8 "RES_0201_100k" RES_0201_UN1Q 8290,1730 r90 top value=100k
R9 "RES_0201_NA" RES_0201_UN1Q 7835,1730 r90 top value=NA
R10 "RES_0201_52k3" RES_0201_UN1Q 19080,2095 r90 top value=52k3
R11 "RES_0201_100k" RES_0201_UN1Q 14610,2085 r90 top value=100k
R12 "RES_0201_100k" RES_0201_UN1Q 14840,2095 r90 top value=100k
R13 "RES_0201_9k76" RES_0201_UN1Q 15390,2095 r90 top value=9k76
R14 "RES_0201_31k6" RES_0201_UN1Q 9095,2095 r90 top value=31k6
R15 "RES_0201_100k" RES_0201_UN1Q 8535,2095 r90 top value=100k
R16 "RES_0201_10k" RES_0201_UN1Q 7975,2095 r90 top value=10k
R17 "RES_0201_121k" RES_0201_UN1Q 7090,2095 r90 top value=121k
R18 "RES_0201_7k15" RES_0201_UN1Q 7345,2095 r90 top value=7k15
R? "RES_0201_4k7" RES_0201_UN1Q 13420,2140 r90 top value=4k7
R? "RES_0201_100k" RES_0201_UN1Q 7400,2140 r90 top value=100k
R? "RES_0201_2k26" RES_0201_UN1Q 8080,2140 r90 top value=2k26
R? "RES_0201_4k7" RES_0201_UN1Q 10740,2140 r90 top value=4k7
R? "RES_0201_100k" RES_0201_UN1Q 7060,2140 r90 top value=100k
R? "RES_0201_100k" RES_0201_UN1Q 7230,2140 r90 top value=100k
R? "RES_0201_4k7" RES_0201_UN1Q 13080,2140 r90 top value=4k7
R? "RES_0201_4k7" RES_0201_UN1Q 12910,2140 r90 top value=4k7
R? "RES_0201_2k26" RES_0201_UN1Q 7740,2140 r90 top value=2k26
R? "RES_0201_4k7" RES_0201_UN1Q 10910,2140 r90 top value=4k7
R? "RES_0201_4k7" RES_0201_UN1Q 12740,2140 r90 top value=4k7
R? "RES_0201_4k7" RES_0201_UN1Q 10230,2140 r90 top value=4k7
R? "RES_0201_4k7" RES_0201_UN1Q 10400,2140 r90 top value=4k7
R? "RES_0201_4k7" RES_0201_UN1Q 10570,2140 r90 top value=4k7
R? "RES_0201_4k7" RES_0201_UN1Q 12570,2140 r90 top value=4k7
R? "RES_0201_4M7" RES_0201_UN1Q 9470,2810 r90 top value=4M7
R? "RES_0201_NA" RES_0201_UN1Q 13640,3100 r90 top value=NA
R? "RES_0201_NA" RES_0201_UN1Q 11425,3100 r90 top value=NA
R? "RES_0201_NA" RES_0201_UN1Q 13840,3100 r90 top value=NA
R? "RES_0201_NA" RES_0201_UN1Q 7090,3100 r90 top value=NA
R? "RES_0201_NA" RES_0201_UN1Q 11225,3100 r90 top value=NA
R? "RES_0201_NA" RES_0201_UN1Q 7295,3100 r90 top value=NA
R? "RES_0201_NA" RES_0201_UN1Q 10195,2810 r90 top value=NA
R? "RES_0201_510k" RES_0201_UN1Q 7990,2810 r90 top value=510k
R? "RES_0201_100k" RES_0201_UN1Q 11120,2810 r90 top value=100k
R? "RES_0201_100k" RES_0201_UN1Q 10915,2810 r90 top value=100k
R? "RES_0201_10k" RES_0201_UN1Q 9410,3100 r90 top value=10k
R? "RES_0201_10k" RES_0201_UN1Q 9995,2810 r90 top value=10k
R? "RES_0201_NA" RES_0201_UN1Q 10715,2810 r90 top value=NA
R? "RES_0201_10k" RES_0201_UN1Q 11520,1435 r90 top value=10k
R? "RES_0201_10k" RES_0201_UN1Q 11115,1435 r90 top value=10k
R? "RES_0201_1k5" RES_0201_UN1Q 11720,1435 r90 top value=1k5
R? "RES_0201_10k" RES_0201_UN1Q 11315,1435 r90 top value=10k
R? "10k" RES_0201_UN1Q 8410,1890 r90 top
R? "RES_0201_1k5" RES_0201_UN1Q 11920,1435 r90 top value=1k5
R? "RES_0201_8k2" RES_0201_UN1Q 7665,1435 r90 top value=8k2
R? "RES_0201_4k7" RES_0201_UN1Q 18415,1025 r90 top value=4k7
R? "RES_0201_4k7" RES_0201_UN1Q 12650,1025 r90 top value=4k7
R? "RES_0201_2k49" RES_0201_UN1Q 12820,1025 r90 top value=2k49
R? "RES_0201_4k7" RES_0201_UN1Q 16395,1025 r90 top value=4k7
R? "RES_0201_4k7" RES_0201_UN1Q 10635,1025 r90 top value=4k7
R? "RES_0201_2k49" RES_0201_UN1Q 7060,1025 r90 top value=2k49
R? "RES_0201_4k7" RES_0201_UN1Q 18240,1025 r90 top value=4k7
R? "RES_0201_4k7" RES_0201_UN1Q 12480,1025 r90 top value=4k7
R? "RES_0201_NA" RES_0201_UN1Q 11030,1890 r90 top value=NA
R? "RES_0201_2k26" RES_0201_UN1Q 7910,2140 r90 top value=2k26
R? "RES_0201_0R" RES_0201_UN1Q 9275,2140 r90 top value=0R
R? "RES_0201_NA" RES_0201_UN1Q 8615,1890 r90 top value=NA
R? "RES_0201_4k7" RES_0201_UN1Q 10060,2140 r90 top value=4k7
R? "RES_0201_2k26" RES_0201_UN1Q 8785,2140 r90 top value=2k26
R? "RES_0201_4k7" RES_0201_UN1Q 13250,2140 r90 top value=4k7
R? "RES_0201_100k" RES_0201_UN1Q 7570,2140 r90 top value=100k
R? "RES_0201_0R" RES_0201_UN1Q 10085,1850 r90 top value=0R
R? "RES_0201_NA" RES_0201_UN1Q 10825,1890 r90 top value=NA
R? "RES_0201_0R" RES_0201_UN1Q 10255,1850 r90 top value=0R
R? "RES_0201_0R" RES_0201_UN1Q 7870,1850 r90 top value=0R
R? "RES_0201_0R" RES_0201_UN1Q 10425,1850 r90 top value=0R
R? "RES_0201_0R" RES_0201_UN1Q 8040,1850 r90 top value=0R
R? "RES_0201_0R" RES_0201_UN1Q 8210,1850 r90 top value=0R
R? "RES_0201_4k7" RES_0201_UN1Q 7380,1850 r90 top value=4k7
R? "RES_0201_10k" RES_0201_UN1Q 10635,9845 r90 top value=10k
R? "RES_0201_12k" RES_0201_UN1Q 10030,9845 r90 top value=12k
R? "RES_0201_10k" RES_0201_UN1Q 10230,9845 r90 top value=10k
R? "FERRITE_0402_BLM15KD" FERR_BLM15KD 9645,9825 r0 top value=30R@100MHz
R? "RES_0201_10k" RES_0201_UN1Q 8515,10520 r90 top value=10k
R? "RES_0201_10k" RES_0201_UN1Q 8110,10520 r90 top value=10k
R? "RES_0201_10k" RES_0201_UN1Q 10835,9845 r90 top value=10k
R? "RES_0201_10k" RES_0201_UN1Q 10430,9845 r90 top value=10k
R? "RES_0201_40k2" RES_0201_UN1Q 14265,7185 r90 top value=40k2
R? "RES_0201_10k" RES_0201_UN1Q 20730,7225 r90 top value=10k
R? "RES_0201_7k15" RES_0201_UN1Q 7435,7225 r90 top value=7k15
R? "RES_0201_9k76" RES_0201_UN1Q 24855,7225 r90 top value=9k76
R? "FERRITE_0402_BLM15KD" FERR_BLM15KD 9845,9825 r0 top value=30R@100MHz
R? "RES_0201_0R" RES_0201_UN1Q 9155,7610 r90 top value=0R
R? "RES_0201_10k" RES_0201_UN1Q 7910,10520 r90 top value=10k
R? "RES_0201_100k" RES_0201_UN1Q 12380,11200 r90 top value=100k
R? "FERRITE_0402_BLM15KD" FERR_BLM15KD 14425,11180 r0 top value=30R@100MHz
R? "RES_0201_100k" RES_0201_UN1Q 12580,11200 r90 top value=100k
R? "RES_0201_10k" RES_0201_UN1Q 8705,11200 r90 top value=10k
R? "RES_0201_10k" RES_0201_UN1Q 7090,11200 r90 top value=10k
R? "RES_0201_10k" RES_0201_UN1Q 8905,11200 r90 top value=10k
R? "FERRITE_0402_BLM15KD" FERR_BLM15KD 14630,11180 r0 top value=30R@100MHz
R? "RES_0201_NA" RES_0201_UN1Q 9310,11200 r90 top value=NA
R? "FERRITE_0402_BLM15KD" FERR_BLM15KD 13785,10500 r0 top value=30R@100MHz
R? "RES_0201_100k" RES_0201_UN1Q 12380,10520 r90 top value=100k
R? "FERRITE_0402_BLM15KD" FERR_BLM15KD 13990,10500 r0 top value=30R@100MHz
R? "RES_0201_100k" RES_0201_UN1Q 12580,10520 r90 top value=100k
R? "RES_0201_10k" RES_0201_UN1Q 9110,11200 r90 top value=10k
R? "RES_0201_NA" RES_0201_UN1Q 9310,10520 r90 top value=NA
R? "RES_0201_10k" RES_0201_UN1Q 8315,10520 r90 top value=10k
R? "RES_0201_100k" RES_0201_UN1Q 7090,4570 r90 top value=100k
R? "RES_0201_100k" RES_0201_UN1Q 7695,4570 r90 top value=100k
R? "RES_0201_100k" RES_0201_UN1Q 12300,4570 r90 top value=100k
R? "RES_0201_100k" RES_0201_UN1Q 7295,4570 r90 top value=100k
R? "RES_0201_0R" RES_0201_UN1Q 17655,4860 r90 top value=0R
R? "RES_0201_10k" RES_0201_UN1Q 23250,4860 r90 top value=10k
R? "RES_0201_NA" RES_0201_UN1Q 8330,4860 r90 top value=NA
R? "RES_0201_10k" RES_0201_UN1Q 11705,4570 r90 top value=10k
R? "RES_0201_8k2" RES_0201_UN1Q 7710,3785 r90 top value=8k2
R? "RES_0201_10k" RES_0201_UN1Q 11505,4570 r90 top value=10k
R? "RES_0201_100k" RES_0201_UN1Q 7495,4570 r90 top value=100k
R? "RES_0201_150k" RES_0201_UN1Q 10420,4570 r90 top value=150k
R? "RES_0201_180k" RES_0201_UN1Q 10220,4570 r90 top value=180k
R? "RES_0201_0R" RES_0201_UN1Q 15840,4860 r90 top value=0R
R? "RES_0201_42k2" RES_0201_UN1Q 17565,7185 r90 top value=42k2
R? "RES_0201_100k" RES_0201_UN1Q 12390,7225 r90 top value=100k
R? "RES_0201_52k3" RES_0201_UN1Q 26585,7225 r90 top value=52k3
R? "RES_0201_121k" RES_0201_UN1Q 20005,7225 r90 top value=121k
R? "RES_0201_11k" RES_0201_UN1Q 10220,7185 r90 top value=11k
R? "RES_0201_100k" RES_0201_UN1Q 24450,7225 r90 top value=100k
R? "RES_0201_12k4" RES_0201_UN1Q 21335,7225 r90 top value=12k4
R? "RES_0201_100k" RES_0201_UN1Q 11700,7225 r90 top value=100k
R? "RES_0201_13k3" RES_0201_UN1Q 12190,7185 r90 top value=13k3
R? "RES_0201_100k" RES_0201_UN1Q 20800,4860 r90 top value=100k
R? "RES_0201_100k" RES_0201_UN1Q 24250,7225 r90 top value=100k
R? "RES_0201_100k" RES_0201_UN1Q 12595,7225 r90 top value=100k
R? "RES_0201_7k15" RES_0201_UN1Q 20210,7225 r90 top value=7k15
R? "RES_0201_56k2" RES_0201_UN1Q 7230,7185 r90 top value=56k2
R? "RES_0201_4k7" RES_0201_UN1Q 13420,2140 r90 top value=4k7
R? "RES_0201_100k" RES_0201_UN1Q 7400,2140 r90 top value=100k
R? "RES_0201_2k26" RES_0201_UN1Q 8080,2140 r90 top value=2k26
R? "RES_0201_4k7" RES_0201_UN1Q 10740,2140 r90 top value=4k7
R? "RES_0201_100k" RES_0201_UN1Q 7060,2140 r90 top value=100k
R? "RES_0201_100k" RES_0201_UN1Q 7230,2140 r90 top value=100k
R? "RES_0201_4k7" RES_0201_UN1Q 13080,2140 r90 top value=4k7
R? "RES_0201_4k7" RES_0201_UN1Q 12910,2140 r90 top value=4k7
R? "RES_0201_2k26" RES_0201_UN1Q 7740,2140 r90 top value=2k26
R? "RES_0201_4k7" RES_0201_UN1Q 10910,2140 r90 top value=4k7
R? "RES_0201_4k7" RES_0201_UN1Q 12740,2140 r90 top value=4k7
R? "RES_0201_4k7" RES_0201_UN1Q 10230,2140 r90 top value=4k7
R? "RES_0201_4k7" RES_0201_UN1Q 10400,2140 r90 top value=4k7
R? "RES_0201_4k7" RES_0201_UN1Q 10570,2140 r90 top value=4k7
R? "RES_0201_4k7" RES_0201_UN1Q 12570,2140 r90 top value=4k7
R? "RES_0201_4M7" RES_0201_UN1Q 9470,2810 r90 top value=4M7
R? "RES_0201_NA" RES_0201_UN1Q 13640,3100 r90 top value=NA
R? "RES_0201_NA" RES_0201_UN1Q 11425,3100 r90 top value=NA
R? "RES_0201_NA" RES_0201_UN1Q 13840,3100 r90 top value=NA
R? "RES_0201_NA" RES_0201_UN1Q 7090,3100 r90 top value=NA
R? "RES_0201_NA" RES_0201_UN1Q 11225,3100 r90 top value=NA
R? "RES_0201_NA" RES_0201_UN1Q 7295,3100 r90 top value=NA
R? "RES_0201_NA" RES_0201_UN1Q 10195,2810 r90 top value=NA
R? "RES_0201_510k" RES_0201_UN1Q 7990,2810 r90 top value=510k
R? "RES_0201_100k" RES_0201_UN1Q 11120,2810 r90 top value=100k
R? "RES_0201_100k" RES_0201_UN1Q 10915,2810 r90 top value=100k
R? "RES_0201_10k" RES_0201_UN1Q 9410,3100 r90 top value=10k
R? "RES_0201_10k" RES_0201_UN1Q 9995,2810 r90 top value=10k
R? "RES_0201_NA" RES_0201_UN1Q 10715,2810 r90 top value=NA
R? "RES_0201_10k" RES_0201_UN1Q 11520,1435 r90 top value=10k
R? "RES_0201_10k" RES_0201_UN1Q 11115,1435 r90 top value=10k
R? "RES_0201_1k5" RES_0201_UN1Q 11720,1435 r90 top value=1k5
R? "RES_0201_10k" RES_0201_UN1Q 11315,1435 r90 top value=10k
R? "10k" RES_0201_UN1Q 8410,1890 r90 top
R? "RES_0201_1k5" RES_0201_UN1Q 11920,1435 r90 top value=1k5
R? "RES_0201_8k2" RES_0201_UN1Q 7665,1435 r90 top value=8k2
R? "RES_0201_4k7" RES_0201_UN1Q 18415,1025 r90 top value=4k7
R? "RES_0201_4k7" RES_0201_UN1Q 12650,1025 r90 top value=4k7
R? "RES_0201_2k49" RES_0201_UN1Q 12820,1025 r90 top value=2k49
R? "RES_0201_4k7" RES_0201_UN1Q 16395,1025 r90 top value=4k7
R? "RES_0201_4k7" RES_0201_UN1Q 10635,1025 r90 top value=4k7
R? "RES_0201_2k49" RES_0201_UN1Q 7060,1025 r90 top value=2k49
R? "RES_0201_4k7" RES_0201_UN1Q 18240,1025 r90 top value=4k7
R? "RES_0201_4k7" RES_0201_UN1Q 12480,1025 r90 top value=4k7
R? "RES_0201_NA" RES_0201_UN1Q 11030,1890 r90 top value=NA
R? "RES_0201_2k26" RES_0201_UN1Q 7910,2140 r90 top value=2k26
R? "RES_0201_0R" RES_0201_UN1Q 9275,2140 r90 top value=0R
R? "RES_0201_NA" RES_0201_UN1Q 8615,1890 r90 top value=NA
R? "RES_0201_4k7" RES_0201_UN1Q 10060,2140 r90 top value=4k7
R? "RES_0201_2k26" RES_0201_UN1Q 8785,2140 r90 top value=2k26
R? "RES_0201_4k7" RES_0201_UN1Q 13250,2140 r90 top value=4k7
R? "RES_0201_100k" RES_0201_UN1Q 7570,2140 r90 top value=100k
R? "RES_0201_0R" RES_0201_UN1Q 10085,1850 r90 top value=0R
R? "RES_0201_NA" RES_0201_UN1Q 10825,1890 r90 top value=NA
R? "RES_0201_0R" RES_0201_UN1Q 10255,1850 r90 top value=0R
R? "RES_0201_0R" RES_0201_UN1Q 7870,1850 r90 top value=0R
R? "RES_0201_0R" RES_0201_UN1Q 10425,1850 r90 top value=0R
R? "RES_0201_0R" RES_0201_UN1Q 8040,1850 r90 top value=0R
R? "RES_0201_0R" RES_0201_UN1Q 8210,1850 r90 top value=0R
R? "RES_0201_4k7" RES_0201_UN1Q 7380,1850 r90 top value=4k7
R? "RES_0201_10k" RES_0201_UN1Q 10635,9845 r90 top value=10k
R? "RES_0201_12k" RES_0201_UN1Q 10030,9845 r90 top value=12k
R? "RES_0201_10k" RES_0201_UN1Q 10230,9845 r90 top value=10k
R? "FERRITE_0402_BLM15KD" FERR_BLM15KD 9645,9825 r0 top value=30R@100MHz
R? "RES_0201_10k" RES_0201_UN1Q 8515,10520 r90 top value=10k
R? "RES_0201_10k" RES_0201_UN1Q 8110,10520 r90 top value=10k
R? "RES_0201_10k" RES_0201_UN1Q 10835,9845 r90 top value=10k
R? "RES_0201_10k" RES_0201_UN1Q 10430,9845 r90 top value=10k
R? "RES_0201_40k2" RES_0201_UN1Q 14265,7185 r90 top value=40k2
R? "RES_0201_10k" RES_0201_UN1Q 20730,7225 r90 top value=10k
R? "RES_0201_7k15" RES_0201_UN1Q 7435,7225 r90 top value=7k15
R? "RES_0201_9k76" RES_0201_UN1Q 24855,7225 r90 top value=9k76
R? "FERRITE_0402_BLM15KD" FERR_BLM15KD 9845,9825 r0 top value=30R@100MHz
R? "RES_0201_0R" RES_0201_UN1Q 9155,7610 r90 top value=0R
R? "RES_0201_10k" RES_0201_UN1Q 7910,10520 r90 top value=10k
R? "RES_0201_100k" RES_0201_UN1Q 12380,11200 r90 top value=100k
R? "FERRITE_0402_BLM15KD" FERR_BLM15KD 14425,11180 r0 top value=30R@100MHz
R? "RES_0201_100k" RES_0201_UN1Q 12580,11200 r90 top value=100k
R? "RES_0201_10k" RES_0201_UN1Q 8705,11200 r90 top value=10k
R? "RES_0201_10k" RES_0201_UN1Q 7090,11200 r90 top value=10k
R? "RES_0201_10k" RES_0201_UN1Q 8905,11200 r90 top value=10k
R? "FERRITE_0402_BLM15KD" FERR_BLM15KD 14630,11180 r0 top value=30R@100MHz
R? "RES_0201_NA" RES_0201_UN1Q 9310,11200 r90 top value=NA
R? "FERRITE_0402_BLM15KD" FERR_BLM15KD 13785,10500 r0 top value=30R@100MHz
R? "RES_0201_100k" RES_0201_UN1Q 12380,10520 r90 top value=100k
R? "FERRITE_0402_BLM15KD" FERR_BLM15KD 13990,10500 r0 top value=30R@100MHz
R? "RES_0201_100k" RES_0201_UN1Q 12580,10520 r90 top value=100k
R? "RES_0201_10k" RES_0201_UN1Q 9110,11200 r90 top value=10k
R? "RES_0201_NA" RES_0201_UN1Q 9310,10520 r90 top value=NA
R? "RES_0201_10k" RES_0201_UN1Q 8315,10520 r90 top value=10k
R? "RES_0201_100k" RES_0201_UN1Q 7090,4570 r90 top value=100k
R? "RES_0201_100k" RES_0201_UN1Q 7695,4570 r90 top value=100k
R? "RES_0201_100k" RES_0201_UN1Q 12300,4570 r90 top value=100k
R? "RES_0201_100k" RES_0201_UN1Q 7295,4570 r90 top value=100k
R? "RES_0201_0R" RES_0201_UN1Q 17655,4860 r90 top value=0R
R? "RES_0201_10k" RES_0201_UN1Q 23250,4860 r90 top value=10k
R? "RES_0201_NA" RES_0201_UN1Q 8330,4860 r90 top value=NA
R? "RES_0201_10k" RES_0201_UN1Q 11705,4570 r90 top value=10k
R? "RES_0201_8k2" RES_0201_UN1Q 7710,3785 r90 top value=8k2
R? "RES_0201_10k" RES_0201_UN1Q 11505,4570 r90 top value=10k
R? "RES_0201_100k" RES_0201_UN1Q 7495,4570 r90 top value=100k
R? "RES_0201_150k" RES_0201_UN1Q 10420,4570 r90 top value=150k
R? "RES_0201_180k" RES_0201_UN1Q 10220,4570 r90 top value=180k
R? "RES_0201_0R" RES_0201_UN1Q 15840,4860 r90 top value=0R
R? "RES_0201_42k2" RES_0201_UN1Q 17565,7185 r90 top value=42k2
R? "RES_0201_100k" RES_0201_UN1Q 12390,7225 r90 top value=100k
R? "RES_0201_52k3" RES_0201_UN1Q 26585,7225 r90 top value=52k3
R? "RES_0201_121k" RES_0201_UN1Q 20005,7225 r90 top value=121k
R? "RES_0201_11k" RES_0201_UN1Q 10220,7185 r90 top value=11k
R? "RES_0201_100k" RES_0201_UN1Q 24450,7225 r90 top value=100k
R? "RES_0201_12k4" RES_0201_UN1Q 21335,7225 r90 top value=12k4
R? "RES_0201_100k" RES_0201_UN1Q 11700,7225 r90 top value=100k
R? "RES_0201_13k3" RES_0201_UN1Q 12190,7185 r90 top value=13k3
R? "RES_0201_100k" RES_0201_UN1Q 20800,4860 r90 top value=100k
R? "RES_0201_100k" RES_0201_UN1Q 24250,7225 r90 top value=100k
R? "RES_0201_100k" RES_0201_UN1Q 12595,7225 r90 top value=100k
R? "RES_0201_7k15" RES_0201_UN1Q 20210,7225 r90 top value=7k15
R? "RES_0201_56k2" RES_0201_UN1Q 7230,7185 r90 top value=56k2
S? "219-4MST" SW_219-4MST 8495,2360 r0 top
S? "219-4MST" SW_219-4MST 12285,2360 r0 top
S? "219-4MST" SW_219-4MST 8495,2360 r0 top
S? "219-4MST" SW_219-4MST 12285,2360 r0 top
T? "TVS_0201_2.5pF_5V" TVS_0201_EZAEG 13340,4860 r90 top value=2.5pF
T? "EMI_Filter_DLM0NSM900HY2" DLM0NSxxxxHY2_Murata 18730,4820 r0 top
T? "EMI_Filter_DLM0NSM900HY2" DLM0NSxxxxHY2_Murata 15160,4820 r0 top
T? "EMI_Filter_DLM0NSM900HY2" DLM0NSxxxxHY2_Murata 18035,4820 r0 top
T? "TVS_0201_2.5pF_5V" TVS_0201_EZAEG 12935,4860 r90 top value=2.5pF
T? "TVS_0201_2.5pF_5V" TVS_0201_EZAEG 13140,4860 r90 top value=2.5pF
T? "TVS_0201_2.5pF_5V" TVS_0201_EZAEG 21320,4860 r90 top value=2.5pF
T? "TVS_0201_2.5pF_5V" TVS_0201_EZAEG 9185,1845 r90 top value=2.5pF
T? "TVS_0201_2.5pF_5V" TVS_0201_EZAEG 13745,4860 r90 top value=2.5pF
T? "TVS_0201_2.5pF_5V" TVS_0201_EZAEG 13540,4860 r90 top value=2.5pF
T? "TVS_0201_2.5pF_5V" TVS_0201_EZAEG 14150,4860 r90 top value=2.5pF
T? "TVS_0201_10pF" TVS_0201_EZAEG 9425,9845 r90 top value=10pF
T? "EMI_ESD_ECMF4-2450A60N10" ECMF4-2450A60N10 9360,7630 r0 top
T? "TVS_0201_10pF" TVS_0201_EZAEG 8840,9845 r90 top value=10pF
T? "TVS_0201_10pF" TVS_0201_EZAEG 14205,11200 r90 top value=10pF
T? "TVS_0201_10pF" TVS_0201_EZAEG 13565,10520 r90 top value=10pF
T? "EMI_ESD_ECMF4-2450A60N10" ECMF4-2450A60N10 10190,7630 r0 top
T? "EMI_Filter_DLM0NSM900HY2" DLM0NSxxxxHY2_Murata 15650,4820 r0 top
T? "TVS_0201_2.5pF_5V" TVS_0201_EZAEG 17855,4860 r90 top value=2.5pF
T? "TVS_0201_2.5pF_5V" TVS_0201_EZAEG 13945,4860 r90 top value=2.5pF
T? "TVS_SD36C-01FTG" SOD-323 7115,7195 r0 top value=36V
T? "TVS_0201_2.5pF_5V" TVS_0201_EZAEG 12735,4860 r90 top value=2.5pF
T? "TVS_0201_2.5pF_5V" TVS_0201_EZAEG 13340,4860 r90 top value=2.5pF
T? "EMI_Filter_DLM0NSM900HY2" DLM0NSxxxxHY2_Murata 18730,4820 r0 top
T? "EMI_Filter_DLM0NSM900HY2" DLM0NSxxxxHY2_Murata 15160,4820 r0 top
T? "EMI_Filter_DLM0NSM900HY2" DLM0NSxxxxHY2_Murata 18035,4820 r0 top
T? "TVS_0201_2.5pF_5V" TVS_0201_EZAEG 12935,4860 r90 top value=2.5pF
T? "TVS_0201_2.5pF_5V" TVS_0201_EZAEG 13140,4860 r90 top value=2.5pF
T? "TVS_0201_2.5pF_5V" TVS_0201_EZAEG 21320,4860 r90 top value=2.5pF
T? "TVS_0201_2.5pF_5V" TVS_0201_EZAEG 9185,1845 r90 top value=2.5pF
T? "TVS_0201_2.5pF_5V" TVS_0201_EZAEG 13745,4860 r90 top value=2.5pF
T? "TVS_0201_2.5pF_5V" TVS_0201_EZAEG 13540,4860 r90 top value=2.5pF
T? "TVS_0201_2.5pF_5V" TVS_0201_EZAEG 14150,4860 r90 top value=2.5pF
T? "TVS_0201_10pF" TVS_0201_EZAEG 9425,9845 r90 top value=10pF
T? "EMI_ESD_ECMF4-2450A60N10" ECMF4-2450A60N10 9360,7630 r0 top
T? "TVS_0201_10pF" TVS_0201_EZAEG 8840,9845 r90 top value=10pF
T? "TVS_0201_10pF" TVS_0201_EZAEG 14205,11200 r90 top value=10pF
T? "TVS_0201_10pF" TVS_0201_EZAEG 13565,10520 r90 top value=10pF
T? "EMI_ESD_ECMF4-2450A60N10" ECMF4-2450A60N10 10190,7630 r0 top
T? "EMI_Filter_DLM0NSM900HY2" DLM0NSxxxxHY2_Murata 15650,4820 r0 top
T? "TVS_0201_2.5pF_5V" TVS_0201_EZAEG 17855,4860 r90 top value=2.5pF
T? "TVS_0201_2.5pF_5V" TVS_0201_EZAEG 13945,4860 r90 top value=2.5pF
T? "TVS_SD36C-01FTG" SOD-323 7115,7195 r0 top value=36V
T? "TVS_0201_2.5pF_5V" TVS_0201_EZAEG 12735,4860 r90 top value=2.5pF
T? "EMI_ESD_PCMF1USB3SZ" PCMF1USB3S_EMI 23170,2050 r0 top
U1 "MIMX8ML8CVNKZAB" BGA548C50P29X29_1500X1500X148 8249.06,4002.48 r0 top
U2 "SM662PBF BFS" GA153C50P14X14_1150X1300X120 9695,1260 r0 top
U3 "PCA9450_HVQFN56P_A" QFN57P40_700X700X100NXP 24295,1825 r0 top
U4 "TPSM64406RCHR" QFN-FCMOD-28_TI 20880,2145 r0 top
U? "MIMX8ML8CVNKZAB" BGA548C50P29X29_1500X1500X148 7350,4060 r0 top
U? "MT53E2G32D4DE-046 AAT:C" BGA200C65P12X22_1000X1450X114 15005,3325 r0 top
U? "PCAL6416AEVJ_VFBGA24" VFBGA24P50_300X300X100_NXP 12520,4575 r0 top
U? "MAX14595ETA+T" MAX14591_SON50P200X200X80-8N 11150,4555 r0 top
U? "MT53E2G32D4DE-046 AAT:C" BGA200C65P12X22_1000X1450X114 15455,3325 r0 top
U? "MXL86110I-AQB" QFN40_5x5mm 17560,1115 r0 top
U? "MXL86110I-AQB" QFN40_5x5mm 11800,1115 r0 top
U? "TPD12S016RKT" UQFN24_RKT0024A_TI 8755,1465 r0 top
U? "SN74AVC1T45DCKR" SOT65P210X110-6N 9525,2170 r0 top
U? "PTN36043BBXY" DHX2QFN18_NXP 11215,10510 r0 top
U? "PTN36043BBXY" DHX2QFN18_NXP 11215,11190 r0 top
U? "TPSM64406RCHR" QFN-FCMOD-28_TI 27805,7305 r0 top
U? "74LVC2G17GS" XSON6_SOT1202_Nexperia 8750,4840 r0 top
U? "TPSM64406RCHR" QFN-FCMOD-28_TI 15890,7305 r0 top
U? "USB2514Bi_M2" USB251xB_QFN36P50_600X600X100 11130,9920 r0 top
U? "SE050E2HQ1/Z01Z3Z" HX2QFN20_NXP 8390,7670 r0 top
U? "MIMX8ML8CVNKZAB" BGA548C50P29X29_1500X1500X148 7350,4060 r0 top
U? "MT53E2G32D4DE-046 AAT:C" BGA200C65P12X22_1000X1450X114 15005,3325 r0 top
U? "PCAL6416AEVJ_VFBGA24" VFBGA24P50_300X300X100_NXP 12520,4575 r0 top
U? "MAX14595ETA+T" MAX14591_SON50P200X200X80-8N 11150,4555 r0 top
U? "MT53E2G32D4DE-046 AAT:C" BGA200C65P12X22_1000X1450X114 15455,3325 r0 top
U? "MXL86110I-AQB" QFN40_5x5mm 17560,1115 r0 top
U? "MXL86110I-AQB" QFN40_5x5mm 11800,1115 r0 top
U? "TPD12S016RKT" UQFN24_RKT0024A_TI 8755,1465 r0 top
U? "SN74AVC1T45DCKR" SOT65P210X110-6N 9525,2170 r0 top
U? "PTN36043BBXY" DHX2QFN18_NXP 11215,10510 r0 top
U? "PTN36043BBXY" DHX2QFN18_NXP 11215,11190 r0 top
U? "TPSM64406RCHR" QFN-FCMOD-28_TI 27805,7305 r0 top
U? "74LVC2G17GS" XSON6_SOT1202_Nexperia 8750,4840 r0 top
U? "TPSM64406RCHR" QFN-FCMOD-28_TI 15890,7305 r0 top
U? "USB2514Bi_M2" USB251xB_QFN36P50_600X600X100 11130,9920 r0 top
U? "SE050E2HQ1/Z01Z3Z" HX2QFN20_NXP 8390,7670 r0 top
X? "Molex_uHDMI_46765-0001" uHDMI-SMD-Molex 7975,1565 r0 top
X? "1775862-2_TE" mPCIe_TE_1775862-2 20115,5010 r0 top
X? "GH-Connector_SM09B-GHS-TB" SM09B-GHS-TB 9980,7885 r90 top
X? "Molex_uHDMI_46765-0001" uHDMI-SMD-Molex 7975,1565 r0 top
X? "1775862-2_TE" mPCIe_TE_1775862-2 20115,5010 r0 top
X? "GH-Connector_SM09B-GHS-TB" SM09B-GHS-TB 9980,7885 r90 top
Y? "XTAL_24M_10ppm_9pF_+105C" XTAL_3225_EPSON 7515,2815 r0 top value=24MHz
Y? "XTAL_25M_ECS_2016_4-SMD" XTAL_2016_UN1Q 7440,1040 r0 top value=25MHz
Y? "XTAL_25M_ECS_2016_4-SMD" XTAL_2016_UN1Q 13200,1040 r0 top value=25MHz
Y? "XTAL_24M_10ppm_9pF_+105C" XTAL_3225_EPSON 11780,9850 r0 top value=24MHz
Y? "9FGV0241AKILF" VFQFPN-24_9FGV0241AKLF 10600,4890 r0 top
Y? "XTAL_25M_ECS_2016_4-SMD" XTAL_2016_UN1Q 9130,4840 r0 top value=25MHz
Y? "XTAL_24M_10ppm_9pF_+105C" XTAL_3225_EPSON 7515,2815 r0 top value=24MHz
Y? "XTAL_25M_ECS_2016_4-SMD" XTAL_2016_UN1Q 7440,1040 r0 top value=25MHz
Y? "XTAL_25M_ECS_2016_4-SMD" XTAL_2016_UN1Q 13200,1040 r0 top value=25MHz
Y? "XTAL_24M_10ppm_9pF_+105C" XTAL_3225_EPSON 11780,9850 r0 top value=24MHz
Y? "9FGV0241AKILF" VFQFPN-24_9FGV0241AKLF 10600,4890 r0 top
Y? "XTAL_25M_ECS_2016_4-SMD" XTAL_2016_UN1Q 9130,4840 r0 top value=25MHz